# Altium PCB PCB2.PcbDoc (part 4 of 4)
Units mm, origin at the board's own origin, x right, y up, seen from the top; angles counter-clockwise.
Board outline 247 x 102 mm, 2 copper layers (Top Layer, Bottom Layer); 199 components, 195 nets, 863 pads, 110 vias.
Unrouted connection lines stored in the file: 60.
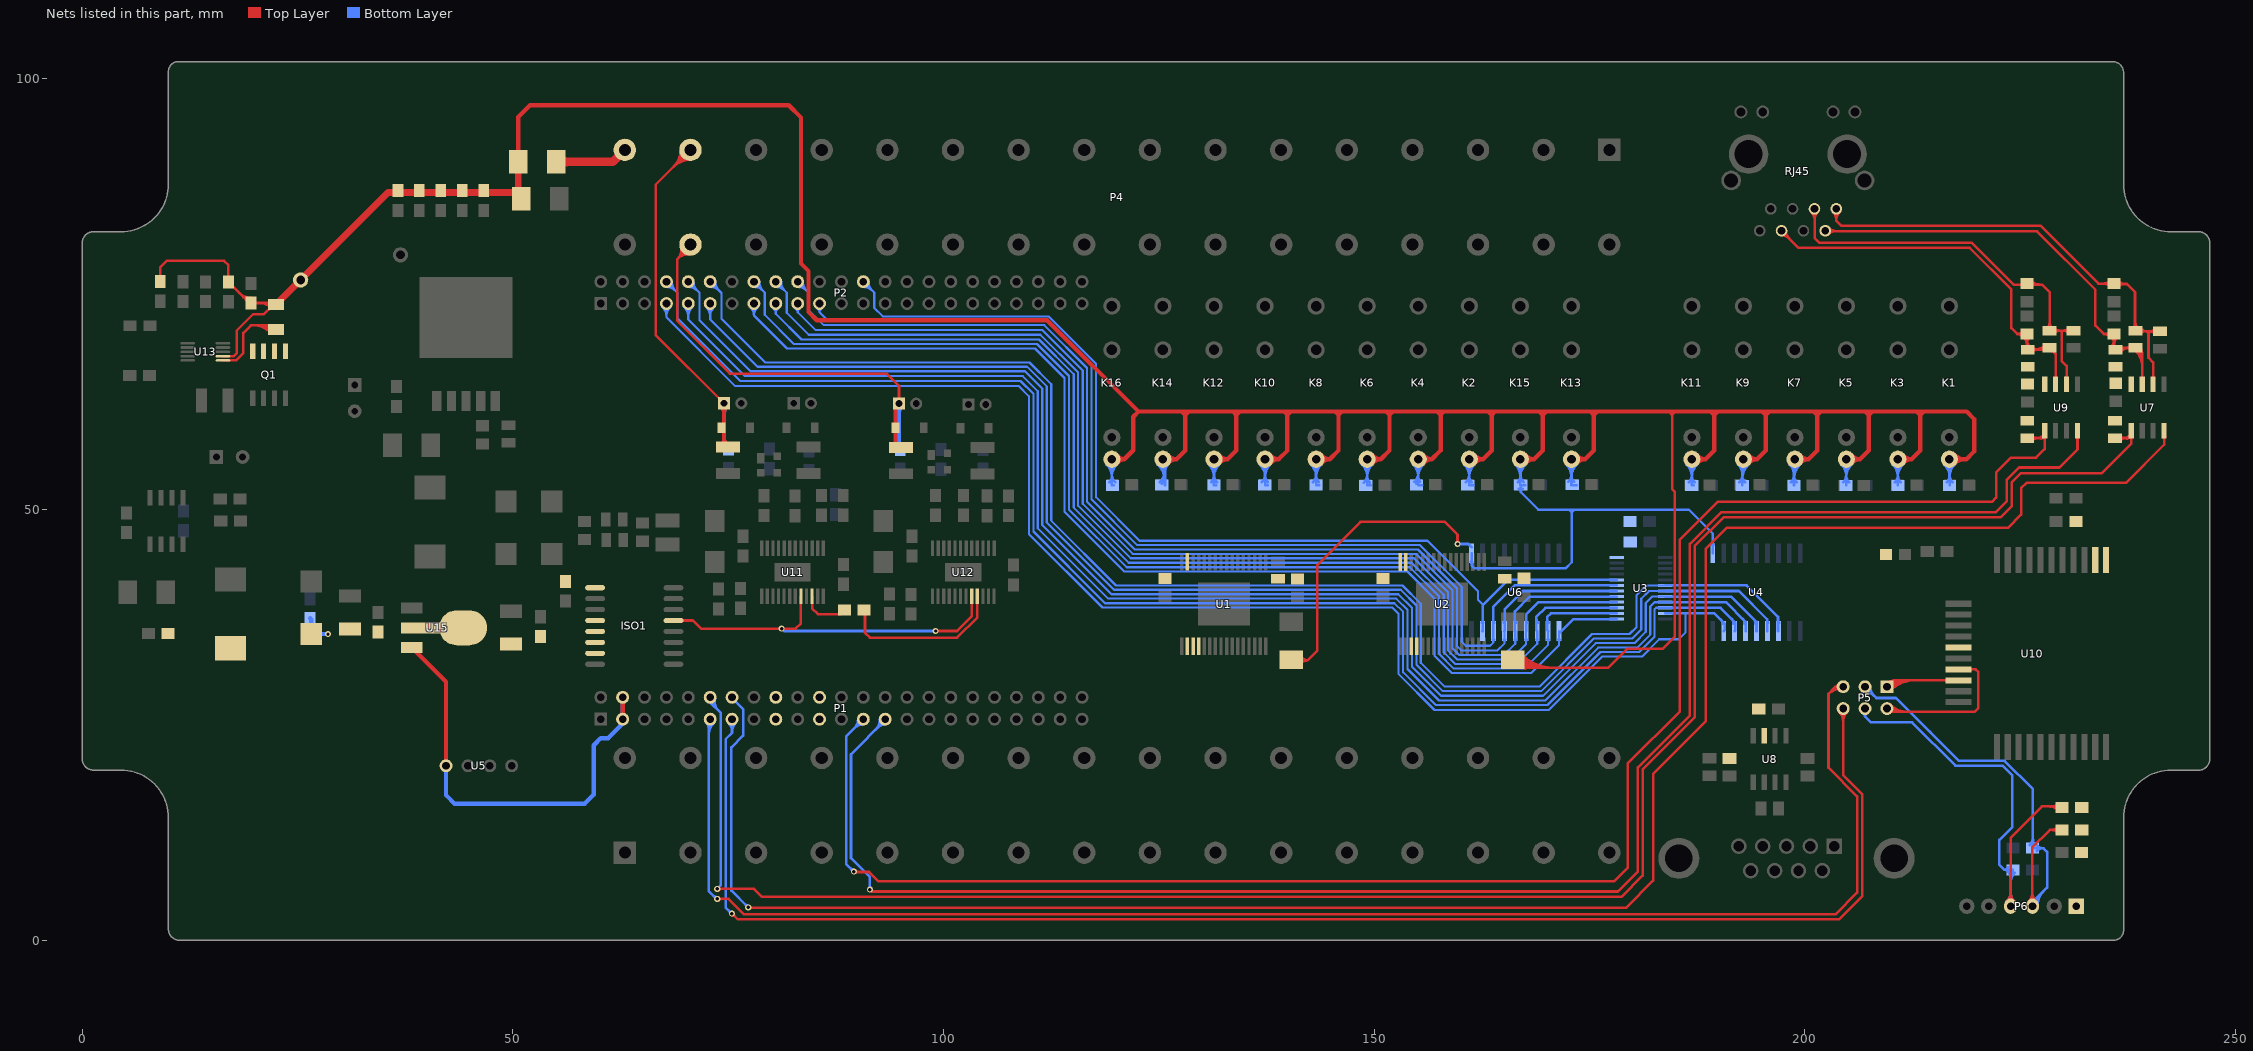
[diagram p4: the nets of this part, all layers, seen from the top]

## Via types
v1: diameter 0.7, hole 0.4, Top Layer to Bottom Layer, 110 vias

## Nets (pads, with @x,y where several pads share a name; then routed paths per layer and width w, separated by ;. In a path a pad name is that pad's centre, name@x,y a point inside that pad or via, vN(x,y) a via of type N, cw(c..) or ccw(c..) an arc to the next point about the centre after c; other vN are vias at no path point) (continued)
PA2: P2.12 U3.6 U4.3 | length 172.9
  Bottom Layer w0.254: P2.12@72.898,75.831 cw(c72.898,74.327) 73.962,75.39 cw(c75.025,76.454) P2.12@73.521,76.454 ; P2.12@72.898,76.085 cw(c72.898,75.194) 73.528,75.824 cw(c74.158,76.454) P2.12@73.267,76.454 ; P2.12@72.898,76.454 74.22,75.132 74.22,72.15 79.29,67.08 109.98,67.08 112.5,64.56 112.5,48.71 120.02,41.19 153.29,41.19 155.41,39.07 155.41,32.21 158.18,29.44 169.18,29.44 175.28,35.54 179.64,35.54 180.46,36.36 180.46,40.08 181.575,41.195 U3.6@183.769,41.195
  Bottom Layer w0.3: U3.6@183.769,41.195 193.225,41.195 196.88,37.54 196.88,35.919 U4.3@196.92,35.879 ; 196.88,37.164 ccw(c197.329,37.164) U4.3@197.011,36.847
PA3: P2.11 U3.7 U4.4 | length 169.4
  Bottom Layer w0.254: P2.11@72.457,73.473 cw(c71.394,72.41) 72.898,72.41 cw(c74.402,72.41) P2.11@73.339,73.473 ; P2.11@72.637,73.653 cw(c72.007,73.023) 72.898,73.023 cw(c73.789,73.023) P2.11@73.159,73.653 ; P2.11@72.898,73.914 72.898,72.072 78.4,66.57 109.7,66.57 111.97,64.3 111.97,48.49 119.78,40.68 153.07,40.68 154.9,38.85 154.9,31.98 157.96,28.92 169.4,28.92 175.5,35.02 179.94,35.02 181,36.08 181,39.65 181.895,40.545 U3.7@183.769,40.545
  Bottom Layer w0.3: U3.7@183.769,40.545 192.335,40.545 195.63,37.25 195.63,35.899 U4.4@195.65,35.879 ; 195.63,37.116 ccw(c196.011,37.116) U4.4@195.741,36.847
PA4: P2.10 U3.8 U4.5 | length 172.5
  Bottom Layer w0.254: P2.10@70.358,75.831 cw(c70.358,74.327) 71.422,75.39 cw(c72.485,76.454) P2.10@70.981,76.454 ; P2.10@70.358,76.085 cw(c70.358,75.194) 70.988,75.824 cw(c71.618,76.454) P2.10@70.727,76.454 ; P2.10@70.358,76.454 71.65,75.162 71.65,71.99 77.59,66.05 109.46,66.05 111.46,64.05 111.46,48.2 119.49,40.17 152.8,40.17 154.38,38.59 154.38,31.76 157.75,28.39 169.61,28.39 175.71,34.49 180.21,34.49 181.52,35.8 181.52,39.14 182.275,39.895 U3.8@183.769,39.895
  Bottom Layer w0.3: U3.8@183.769,39.895 191.435,39.895 194.38,36.95 U4.5@194.38,35.879 ; 194.021,37.309 cw(c193.468,36.755) U4.5@194.251,36.755
PA5: P2.9 U3.9 U4.6 | length 169.4
  Bottom Layer w0.254: P2.9@69.917,73.473 cw(c68.854,72.41) 70.358,72.41 cw(c71.862,72.41) P2.9@70.799,73.473 ; P2.9@70.097,73.653 cw(c69.467,73.023) 70.358,73.023 cw(c71.249,73.023) P2.9@70.619,73.653 ; P2.9@70.358,73.914 70.358,72.072 76.94,65.49 109.2,65.49 110.94,63.75 110.94,47.83 119.11,39.66 152.55,39.66 153.86,38.35 153.86,31.48 157.52,27.82 169.85,27.82 176,33.97 180.53,33.97 182.04,35.48 182.04,38.75 182.535,39.245 U3.9@183.769,39.245
  Bottom Layer w0.3: U3.9@183.769,39.245 190.835,39.245 193.12,36.96 193.12,35.889 U4.6@193.11,35.879 ; 192.737,37.343 cw(c192.149,36.755) U4.6@192.981,36.755
PA6: P2.8 U3.10 U4.7 | length 172.4
  Bottom Layer w0.254: P2.8@67.818,75.831 cw(c67.818,74.327) 68.882,75.39 cw(c69.945,76.454) P2.8@68.441,76.454 ; P2.8@67.818,76.085 cw(c67.818,75.194) 68.448,75.824 cw(c69.078,76.454) P2.8@68.187,76.454 ; P2.8@67.818,76.454 69.12,75.152 69.12,72.19 76.38,64.93 108.94,64.93 110.43,63.44 110.43,47.44 118.74,39.13 152.34,39.13 153.35,38.12 153.35,31.1 157.15,27.3 170.11,27.3 176.26,33.45 180.78,33.45 182.548,35.218 182.548,38.408 182.735,38.595 U3.10@183.769,38.595
  Bottom Layer w0.3: U3.10@183.769,38.595 190.205,38.595 191.91,36.89 191.91,35.949 U4.7@191.84,35.879 ; 191.474,37.326 cw(c190.904,36.755) U4.7@191.711,36.755
PA7: P2.7 U3.11 U4.8 | length 170.7
  Bottom Layer w0.254: P2.7@67.377,73.473 cw(c66.314,72.41) 67.818,72.41 cw(c69.322,72.41) P2.7@68.259,73.473 ; P2.7@67.557,73.653 cw(c66.927,73.023) 67.818,73.023 cw(c68.709,73.023) P2.7@68.079,73.653 ; P2.7@67.818,73.914 67.818,72.312 75.77,64.36 108.69,64.36 109.9,63.15 109.9,47.17 118.45,38.62 152.08,38.62 152.83,37.87 152.83,30.89 156.99,26.73 170.26,26.73 176.46,32.93 181.1,32.93 183.1,34.93 185.33,34.93 186.15,35.75 186.15,37.945
  Bottom Layer w0.3: U3.11@183.769,37.945 189.495,37.945 190.68,36.76 190.68,35.989 U4.8@190.57,35.879 ; 190.268,37.172 cw(c189.851,36.755) U4.8@190.441,36.755
PB0: P2.15 U3.13 U6.1 | length 139.3
  Bottom Layer w0.254: P2.15@77.565,73.447 cw(c76.757,72.532) 77.978,72.532 ; P2.15@77.734,73.637 cw(c77.255,73.095) 77.978,73.095 cw(c78.701,73.095) P2.15@78.222,73.637 ; P2.15@77.978,73.914 77.978,72.532 ; P2.15@78.391,73.447 ccw(c79.199,72.532) 77.978,72.532 ; U6.1@171.352,34.895 cw(c171.092,34.635) 171.46,34.635 cw(c171.828,34.635) U6.1@171.568,34.895 ; U6.1@171.46,35.879 171.46,34.25 168.23,31.02 158.99,31.02 157,33.01 157,39.66 153.86,42.8 120.98,42.8 114.04,49.74 114.04,65.27 110.62,68.69 81.82,68.69 77.978,72.532
  Bottom Layer w0.3: U6.1@171.46,35.59 173.14,37.27 178.106,37.27 U3.13@178.131,37.295
PB1: P2.16 U3.14 U6.2 | length 142.9
  Bottom Layer w0.254: P2.16@77.978,75.831 cw(c77.978,74.327) 79.042,75.39 cw(c80.105,76.454) P2.16@78.601,76.454 ; P2.16@77.978,76.085 cw(c77.978,75.194) 78.608,75.824 cw(c79.238,76.454) P2.16@78.347,76.454 ; P2.16@77.978,76.454 79.24,75.192 79.24,72.6 82.62,69.22 110.85,69.22 114.57,65.5 114.57,49.99 121.25,43.31 154.12,43.31 157.51,39.92 157.51,33.25 159.23,31.53 167.42,31.53 170.19,34.3 U6.2@170.19,35.879 ; U6.2@170.082,34.895 cw(c169.822,34.635) 170.19,34.635 cw(c170.558,34.635) U6.2@170.298,34.895
  Bottom Layer w0.3: 170.07,37.357 ccw(c170.792,37.357) U6.2@170.281,36.847 ; U6.2@170.19,35.879 170.07,35.999 170.07,37.52 170.495,37.945 U3.14@178.131,37.945
PB2: P2.17 U3.15 U6.3 | length 135.9
  Bottom Layer w0.254: P2.17@80.166,73.4 cw(c79.708,72.732) 80.518,72.732 ; P2.17@80.518,73.914 80.518,72.732 ; P2.17@80.87,73.4 ccw(c81.328,72.732) 80.518,72.732 ; U6.3@168.812,34.895 cw(c168.552,34.635) 168.92,34.635 cw(c169.288,34.635) U6.3@169.028,34.895 ; U6.3@168.92,35.879 168.92,34.41 166.56,32.05 159.43,32.05 158.06,33.42 158.06,40.1 154.328,43.832 121.498,43.832 115.11,50.22 115.11,65.7 111.07,69.74 83.51,69.74 80.518,72.732
  Bottom Layer w0.3: 168.83,37.285 ccw(c169.45,37.285) U6.3@169.011,36.847 ; U6.3@168.92,35.879 168.83,35.969 168.83,37.56 169.865,38.595 U3.15@178.131,38.595
PB3: P2.18 U3.16 U6.4 | length 139.6
  Bottom Layer w0.254: P2.18@80.518,75.831 cw(c80.518,74.327) 81.582,75.39 cw(c82.645,76.454) P2.18@81.141,76.454 ; P2.18@80.518,76.085 cw(c80.518,75.194) 81.148,75.824 cw(c81.778,76.454) P2.18@80.887,76.454 ; P2.18@80.518,76.454 81.79,75.182 81.79,72.85 84.34,70.3 111.23,70.3 115.62,65.91 115.62,50.44 121.72,44.34 154.61,44.34 158.58,40.37 158.58,33.62 159.62,32.58 165.84,32.58 167.63,34.37 U6.4@167.63,35.899 ; U6.4@167.542,34.895 cw(c167.33,34.683) 167.63,34.683 ; 167.63,34.586 cw(c168.066,34.586) U6.4@167.758,34.895
  Bottom Layer w0.3: U6.4@167.63,35.879 167.63,37.79 169.085,39.245 U3.16@178.131,39.245 ; U6.4@167.63,35.899 U6.4@167.65,35.879 ; 167.63,37.116 ccw(c168.011,37.116) U6.4@167.742,36.847
PB4: P2.19 U3.17 U6.5 | length 132.8
  Bottom Layer w0.254: P2.19@82.782,73.355 cw(c82.564,72.912) 83.058,72.912 ; P2.19@83.058,73.914 83.058,72.912 ; P2.19@83.334,73.355 ccw(c83.552,72.912) 83.058,72.912 ; U6.5@166.272,34.895 cw(c166.012,34.635) 166.38,34.635 cw(c166.748,34.635) U6.5@166.488,34.895 ; U6.5@166.38,35.879 166.38,34.42 165.07,33.11 159.86,33.11 159.1,33.87 159.1,40.61 154.855,44.855 121.955,44.855 116.15,50.66 116.15,66.14 111.43,70.86 85.11,70.86 83.058,72.912
  Bottom Layer w0.3: U6.5@166.32,35.879 166.32,38.16 168.055,39.895 U3.17@178.131,39.895 ; U6.5@166.32,35.939 U6.5@166.38,35.879 ; 166.32,37.212 ccw(c166.837,37.212) U6.5@166.472,36.847
PB5: P2.20 U3.18 U6.6 | length 137
  Bottom Layer w0.254: P2.20@83.058,75.831 cw(c83.058,74.327) 84.122,75.39 cw(c85.185,76.454) P2.20@83.681,76.454 ; P2.20@83.058,76.085 cw(c83.058,75.194) 83.688,75.824 cw(c84.318,76.454) P2.20@83.427,76.454 ; P2.20@83.058,76.454 84.35,75.162 84.35,73.14 86.08,71.41 111.68,71.41 116.66,66.43 116.66,50.91 122.207,45.363 155.077,45.363 159.61,40.83 159.61,34.13 160.09,33.65 164.3,33.65 165.14,34.49 U6.6@165.14,36.07 ; U6.6@165.002,34.895 cw(c164.67,34.562) 165.14,34.562 ; 165.14,34.707 cw(c165.406,34.707) U6.6@165.218,34.895
  Bottom Layer w0.3: U6.6@165.019,36.847 ccw(c164.725,37.14) 165.14,37.14 ; U6.6@165.11,35.879 165.14,35.909 165.14,38.42 167.265,40.545 U3.18@178.131,40.545
PB6: P2.21 U3.19 U6.7 | length 129.8
  Bottom Layer w0.254: P2.21@85.317,73.358 cw(c85.088,72.902) 85.598,72.902 ; P2.21@85.598,73.914 85.598,72.902 ; P2.21@85.879,73.358 ccw(c86.108,72.902) 85.598,72.902 ; U6.7@163.732,34.895 cw(c163.544,34.707) 163.81,34.707 ; 163.81,34.562 cw(c164.28,34.562) U6.7@163.948,34.895 ; U6.7@163.81,35.909 163.81,34.55 163.45,34.19 160.62,34.19 160.16,34.65 160.16,41.02 155.309,45.871 122.479,45.871 117.17,51.18 117.17,66.68 111.93,71.92 86.58,71.92 85.598,72.902
  Bottom Layer w0.3: U6.7@163.81,35.879 163.81,38.71 166.295,41.195 U3.19@178.131,41.195 ; U6.7@163.81,35.909 U6.7@163.84,35.879 ; 163.81,37.14 ccw(c164.225,37.14) U6.7@163.931,36.847
PB7: P2.26 U3.20 U6.8 | length 122.2
  Bottom Layer w0.254: P2.26@90.678,75.831 cw(c90.678,74.327) 91.742,75.39 cw(c92.805,76.454) P2.26@91.301,76.454 ; P2.26@90.678,76.085 cw(c90.678,75.194) 91.308,75.824 cw(c91.938,76.454) P2.26@91.047,76.454 ; P2.26@90.678,76.454 91.94,75.192 91.94,73.41 92.92,72.43 112.17,72.43 117.71,66.89 117.71,51.42 122.751,46.379 156.181,46.379 162.05,40.51 162.05,39.51 162.58,38.98 162.58,38.925
  Bottom Layer w0.3: U6.8@162.479,36.847 ccw(c162.233,37.092) 162.58,37.092 ; U6.8@162.57,35.879 162.58,35.889 162.58,38.925 ; 162.58,37.043 ccw(c162.858,37.043) U6.8@162.661,36.847 ; 162.615,38.925 165.535,41.845 U3.20@178.131,41.845
PWM_TIM1_CH3: U10.16
RS485A1: C9.2 R22.1 R23.1 RJ45.1 U7.6 | length 64.8
  Top Layer w0.3: RJ45.1@203.279,84.539 cw(c202.383,83.643) 203.65,83.643 cw(c204.917,83.643) RJ45.1@204.021,84.539 ; RJ45.1@203.65,84.91 203.65,83.52 204.2,82.97 227.33,82.97 234.07,76.23 C9.2@235.9,76.23 235.94,76.19 237.38,76.19 238.33,75.24 R22.1@238.33,70.68 ; C9.2@235.446,75.876 ccw(c234.593,75.023) 234.593,76.23 ccw(c234.593,77.437) C9.2@235.446,76.584 ; C9.2@236.354,75.876 cw(c237.111,75.119) 237.111,76.19 ; C9.2@236.354,76.584 ccw(c237.304,77.534) 237.304,76.19 ; R22.1@238.107,71.063 ccw(c237.569,71.601) 238.33,71.601 ; R22.1@238.23,70.58 R22.1@238.33,70.68 ; 238.33,71.891 ccw(c239.501,71.891) R22.1@238.673,71.063 ; R22.1@238.923,70.497 cw(c239.364,70.056) 239.364,70.68 ; R22.1@238.923,71.063 ccw(c239.847,71.987) 239.847,70.68 ; 239.67,70.66 239.89,70.44 ; 240.11,70.66 239.89,70.44 ; U7.6@240.328,65.246 ccw(c240.072,65.502) 240.434,65.502 ccw(c240.796,65.502) U7.6@240.54,65.246 ; U7.6@240.434,64.54 240.434,67.086 239.89,67.63 239.89,70.44 ; R23.1@240.707,70.397 ccw(c240.024,69.714) 240.024,70.68 ccw(c240.024,71.646) R23.1@240.707,70.963 ; R23.1@241.24,70.68 R22.1@238.33,70.68
RS485A2: C12.2 R29.1 R30.1 RJ45.3 U9.6 | length 57.2
  Top Layer w0.3: RJ45.3@200.739,84.539 cw(c199.77,83.57) 201.14,83.57 ; RJ45.3@201.11,84.91 201.14,84.88 201.14,81.53 201.71,80.96 219.38,80.96 224.23,76.11 227.53,76.11 228.41,75.23 R29.1@228.41,70.78 R30.1@231.2,70.78 ; 201.14,83.715 cw(c202.305,83.715) RJ45.3@201.481,84.539 ; C12.2@225.69,76.23 C12.2@225.81,76.11 ; C12.2@226.011,76.371 ccw(c226.643,77.003) 226.643,76.11 ; C12.2@226.224,75.876 cw(c226.787,75.313) 226.787,76.11 ; C12.2@226.224,76.584 ccw(c227.367,77.727) 227.367,76.11 ; R29.1@228.127,71.063 ccw(c227.444,71.746) 228.41,71.746 ccw(c229.376,71.746) R29.1@228.693,71.063 ; R29.1@228.943,70.497 cw(c229.626,69.814) 229.626,70.78 cw(c229.626,71.746) R29.1@228.943,71.063 ; 229.63,70.78 229.81,70.6 ; 229.99,70.78 229.81,70.6 ; U9.6@230.278,65.246 ccw(c230.022,65.502) 230.384,65.502 ccw(c230.746,65.502) U9.6@230.49,65.246 ; U9.6@230.384,64.54 230.384,66.666 229.81,67.24 229.81,70.6 ; R30.1@230.667,70.497 ccw(c229.984,69.814) 229.984,70.78 ccw(c229.984,71.746) R30.1@230.667,71.063
RS485B1: C8.2 R21.1 R22.2 RJ45.2 U7.7 | length 67.3
  Top Layer w0.3: RJ45.2@202.37,82.13 202.54,82.3 226.95,82.3 233.73,75.52 233.73,71.35 234.71,70.37 ; RJ45.2@202.529,82.529 ccw(c203.082,83.082) 203.082,82.3 ; RJ45.2@202.741,81.999 cw(c203.468,81.272) 203.468,82.3 ; RJ45.2@202.741,82.741 ccw(c203.806,83.806) 203.806,82.3 ; C8.2@235.421,70.044 ccw(c234.71,69.432) 234.71,70.37 ; C8.2@235.421,70.696 cw(c234.71,71.308) 234.71,70.37 ; R21.1@235.537,68.863 ccw(c234.661,69.739) C8.2@235.9,69.739 ; C8.2@235.546,70.016 cw(c234.693,69.163) 235.9,69.163 cw(c237.107,69.163) C8.2@236.254,70.016 ; 235.9,69.353 ccw(c236.593,69.353) R21.1@236.103,68.863 ; R21.1@236.391,68.509 cw(c237.044,67.856) 237.044,68.78 ; R21.1@236.603,68.297 cw(c237.769,67.131) R22.2@237.769,68.78 ; R22.2@237.857,68.497 ccw(c237.174,67.814) 237.174,68.78 ccw(c237.174,69.746) R22.2@237.857,69.063 ; R22.2@238.357,68.497 cw(c236.41,66.55) 239.164,66.55 ; R22.2@238.39,68.78 236.27,68.78 R21.1@236.07,68.58 235.9,68.75 C8.2@235.9,70.37 234.71,70.37 ; R22.2@238.51,68.8 239.164,68.146 U7.7@239.164,64.54 ; R22.2@238.569,68.709 cw(c237.134,67.274) 239.164,67.274 ; R22.2@238.654,68.38 cw(c238.676,67.768) 239.109,68.201 cw(c239.401,68.493) R22.2@239.014,68.639 ; R22.2@238.781,68.921 cw(c237.858,67.998) 239.164,67.998 ; U7.7@239.058,65.246 ccw(c238.802,65.502) 239.164,65.502 ccw(c239.526,65.502) U7.7@239.27,65.246
RS485B2: C11.2 R28.1 R29.2 RJ45.6 U9.7 | length 56.6
  Top Layer w0.3: RJ45.6@197.29,81.845 cw(c197.29,80.578) 198.186,81.474 cw(c199.082,82.37) RJ45.6@197.815,82.37 ; RJ45.6@197.29,82.37 199.27,80.39 219.14,80.39 223.97,75.56 223.97,71.08 224.68,70.37 ; C11.2@225.268,70.073 ccw(c224.68,69.64) 224.68,70.37 ; C11.2@225.268,70.667 cw(c224.68,71.1) 224.68,70.37 ; C11.2@225.416,70.016 cw(c224.563,69.163) 225.77,69.163 cw(c226.977,69.163) C11.2@226.124,70.016 ; R28.1@225.597,68.863 ccw(c225.18,69.28) 225.77,69.28 ; C11.2@225.77,69.811 ccw(c227.111,69.811) R28.1@226.163,68.863 ; R28.1@226.413,68.297 cw(c227.096,67.614) 227.096,68.58 cw(c227.096,69.546) R28.1@226.413,68.863 ; 226.711,68.58 ccw(c226.711,70.229) R29.2@227.877,69.063 ; 227.436,68.58 ccw(c227.436,69.504) R29.2@228.089,68.851 ; R29.2@228.66,68.38 cw(c228.66,68.018) R29.2@228.916,68.274 ; R29.2@228.971,68.529 ccw(c229.162,68.375) 228.989,68.201 ; U9.7@229.008,65.246 ccw(c228.752,65.502) 229.114,65.502 ccw(c229.476,65.502) U9.7@229.22,65.246 ; U9.7@229.114,64.54 229.114,68.076 R29.2@228.41,68.78 228.21,68.58 R28.1@225.88,68.58 225.77,68.69 C11.2@225.77,70.37 224.68,70.37
SCLK_AO: ISO1.13 U11.8 U12.8 | length 44.4
  Top Layer w0.3: ISO1.13@68.64,37.115 70.905,37.115 71.85,36.17 82.81,36.17 83.433,36.793 U11.8@83.433,39.944 ; ISO1.13@69.596,37.009 cw(c69.852,36.753) 69.852,37.115 cw(c69.852,37.477) ISO1.13@69.596,37.221 ; v1(99.07,35.9) 101.563,35.9 103.263,37.6 U12.8@103.263,39.944
  Bottom Layer w0.3: v1@81.19,36.19 81.48,35.9 v1(99.07,35.9)
  other v1: 81.2,36.17
SDI2: R38.1 U12.9 | length 19.4
  Top Layer w0.3: R38.1@90.78,38.33 90.88,38.23 90.88,35.68 91.431,35.129 101.576,35.129 103.913,37.467 U12.9@103.913,39.944
SDO1: R38.2 U11.10 | length 5.7
  Top Layer w0.3: U11.10@84.733,39.944 84.733,38.527 85.41,37.85 88.014,37.85 R38.2@88.494,38.33
SPI0_CS0: P1.17 U1.4 U2.4
SPI0_MISO: ISO1.6 P1.21 U2.32
SPI0_MOSI: ISO1.5 P1.18 U1.2
SPI0_SCLK: ISO1.4 P1.22 U1.3 U2.3
UART2_RX-O: P1.11 P5.5 | length 194.7
  Top Layer w0.3: v1(73.72,4.79) 75.03,4.79 76.82,3 203.54,3 206.06,5.52 206.06,16.71 202.74,20.03 202.74,28.59 203.58,29.43 ; v1@73.861,4.649 cw(c74.203,4.307) 74.203,4.79 cw(c74.203,5.273) v1@73.861,4.931 ; 202.732,28.582 cw(c204.112,27.202) P5.5@204.396,29.133 ; 203.15,29 cw(c203.586,28.564) P5.5@204.019,29.003 ; 203.154,29.004 cw(c204.221,27.938) P5.5@204.44,29.43 ; 203.364,29.214 cw(c203.798,28.779) P5.5@204.229,29.216 ; 203.576,29.426 cw(c204.329,28.674) P5.5@204.484,29.727 ; 203.577,29.427 cw(c204.01,28.994) P5.5@204.44,29.43 ; P5.5@203.877,29.223 ccw(c203.58,29.114) 203.58,29.43 ; P5.5@203.877,29.637 cw(c203.58,29.746) 203.58,29.43 ; 203.58,29.43 P5.5@204.44,29.43
  Bottom Layer w0.3: P1.11@72.474,25.234 cw(c71.903,24.663) 72.71,24.663 ; 72.71,23.756 cw(c74.8,23.756) P1.11@73.322,25.234 ; 72.71,24.48 cw(c74.076,24.48) P1.11@73.11,25.446 ; P1.11@72.898,25.658 72.71,25.47 72.71,5.73 v1@73.685,4.755 ; 73.259,5.181 ccw(c73.72,5.642) v1@73.72,4.99 ; 73.428,5.012 cw(c73.206,4.79) v1@73.52,4.79
UART2_TX-O: P1.13 P5.6 | length 184.6
  Top Layer w0.3: v1@75.42,2.88 cw(c75.42,2.325) 75.813,2.717 ; v1@75.435,3.095 76.1,2.43 203.98,2.43 206.68,5.13 206.68,16.93 204.44,19.17 P5.6@204.44,26.89 ; v1@75.62,3.08 ccw(c76.03,3.08) 75.74,2.79 ; P5.6@204.016,26.466 cw(c202.991,25.441) 204.44,25.441 cw(c205.889,25.441) P5.6@204.864,26.466
  Bottom Layer w0.3: P1.13@75.014,25.234 cw(c73.989,24.209) 75.438,24.209 cw(c76.887,24.209) P1.13@75.862,25.234 ; v1@75.22,3.08 ccw(c74.737,3.08) 75.079,3.421 ccw(c75.42,3.763) v1@75.42,3.28 ; v1(75.42,3.08) 74.69,3.81 74.69,23.33 75.438,24.078 P1.13@75.438,25.658
UART3_RX: P1.12 R19.1 U7.1 | length 241.5
  Top Layer w0.3: v1(73.72,5.97) 78.01,5.97 78.94,5.04 178.7,5.04 181.17,7.51 181.17,19.84 187.208,25.878 187.208,45.748 190.56,49.1 222.72,49.1 224,50.38 224,53.15 225.08,54.23 234.47,54.23 237.894,57.654 U7.1@237.894,59.14 ; v1@73.861,5.829 cw(c74.203,5.487) 74.203,5.97 cw(c74.203,6.453) v1@73.861,6.111 ; R19.1@235.99,58.3 237.48,58.3 ; R19.1@236.523,58.017 cw(c237.206,57.334) 237.206,58.3 cw(c237.206,59.266) R19.1@236.523,58.583 ; 236.952,58.3 ccw(c236.952,59.482) U7.1@237.788,58.646 ; 237.393,58.213 cw(c237.827,57.779) U7.1@237.881,58.391 ; U7.1@237.744,58.549 cw(c237.48,58.564) 237.48,58.3 ; U7.1@237.788,58.434 cw(c237.532,58.178) 237.894,58.178 cw(c238.256,58.178) U7.1@238,58.434 ; U7.1@237.92,58.74 237.48,58.3
  Bottom Layer w0.3: 73.1,27.42 cw(c73.661,27.981) P1.12@72.898,28.198 72.898,27.622 74.11,26.41 74.11,6.36 v1(73.72,5.97) ; P1.12@73.187,28.116 ccw(c74.223,27.821) 73.461,27.059 ; P1.12@73.475,28.034 ccw(c74.785,27.661) 73.822,26.698
UART3_TX: P1.14 U7.4 | length 236.7
  Top Layer w0.3: v1@77.3,3.79 179.26,3.79 182.374,6.904 182.374,19.314 188.473,25.413 188.473,45.44 190.903,47.87 223.56,47.87 225.108,49.418 225.108,52.475 225.733,53.1 237.28,53.1 241.704,57.524 U7.4@241.704,59.14 ; U7.4@241.598,58.434 cw(c241.342,58.178) 241.704,58.178 cw(c242.066,58.178) U7.4@241.81,58.434
  Bottom Layer w0.3: P1.14@75.438,28.198 75.438,28.112 76.73,26.82 76.73,23.76 75.37,22.4 75.37,5.765 v1(77.32,3.815) ; v1@77.12,3.815 ccw(c76.637,3.815) 76.979,4.156 ccw(c77.32,4.498) v1@77.32,4.015
UART4_RX: P1.25 R27.1 U9.1 | length 210.8
  Top Layer w0.3: v1(89.59,7.96) 89.63,7.92 91.353,7.92 92.453,6.82 177.84,6.82 179.41,8.39 179.41,20.5 185.48,26.57 185.48,46.51 189.87,50.9 221.72,50.9 222.21,51.39 222.21,54.32 223.92,56.03 226.85,56.03 227.844,57.024 U9.1@227.844,59.14 ; v1@89.731,7.819 cw(c89.976,7.574) 89.976,7.92 ; v1@89.731,8.101 ccw(c90.169,8.539) 90.169,7.92 ; R27.1@225.81,58.3 227.49,58.3 U9.1@227.83,58.64 ; R27.1@226.343,58.017 cw(c227.026,57.334) 227.026,58.3 cw(c227.026,59.266) R27.1@226.343,58.583 ; 226.902,58.3 ccw(c226.902,59.482) U9.1@227.738,58.646 ; 227.433,58.243 cw(c227.792,57.884) U9.1@227.832,58.39 ; U9.1@227.626,58.3 ccw(c227.626,58.757) 227.95,58.434 ccw(c228.206,58.178) 227.844,58.178 ccw(c227.482,58.178) U9.1@227.738,58.434
  Bottom Layer w0.3: v1@89.39,7.96 ccw(c88.907,7.96) 89.249,8.301 ccw(c89.59,8.643) v1@89.59,8.16 ; v1(89.59,7.96) 88.692,8.858 88.692,23.672 P1.25@90.678,25.658 ; P1.25@90.078,25.658 cw(c88.629,25.658) 89.654,24.634 cw(c90.678,23.609) P1.25@90.678,25.058
UART4_TX: P1.27 U9.4 | length 210.7
  Top Layer w0.3: v1(91.44,5.87) 91.66,5.65 178.29,5.65 180.61,7.97 180.61,20.07 186.654,26.114 186.654,46.014 190.33,49.69 222.17,49.69 223.42,50.94 223.42,53.43 224.87,54.88 229.56,54.88 231.654,56.974 U9.4@231.654,59.14 ; U9.4@231.548,58.434 cw(c231.292,58.178) 231.654,58.178 cw(c232.016,58.178) U9.4@231.76,58.434
  Bottom Layer w0.3: v1@91.299,6.011 ccw(c90.957,6.353) 91.44,6.353 ccw(c91.923,6.353) v1@91.581,6.011 ; v1(91.44,5.87) 91.44,7.34 89.246,9.534 89.246,21.576 93.218,25.548 P1.27@93.218,25.658 ; 92.116,24.446 ccw(c90.904,25.658) P1.27@92.618,25.658 ; 92.382,24.712 cw(c93.218,23.875) P1.27@93.218,25.058 ; 92.628,24.958 ccw(c91.928,25.658) P1.27@92.918,25.658
UART_RXD: C16.2 P5.3 P6.3 R33.2 | length 65.4
  Top Layer w0.3: P6.3@225.996,4.513 ccw(c225.044,5.465) 226.39,5.465 ; 226.39,4.886 ccw(c227.217,4.886) P6.3@226.632,4.301 ; 226.39,5.61 ccw(c227.941,5.61) P6.3@226.844,4.513 ; P6.3@226.42,3.95 226.39,3.98 226.39,10.77 228.43,12.81 R33.2@229.864,12.81 ; R33.2@229.394,12.467 ccw(c228.566,11.639) 228.566,12.81 ccw(c228.566,13.981) R33.2@229.394,13.153
  Bottom Layer w0.3: P5.3@206.98,28.83 cw(c206.98,27.381) 208.004,28.406 cw(c209.029,29.43) P5.3@207.58,29.43 ; P5.3@206.98,29.43 208.29,28.12 210.58,28.12 214.51,24.19 214.52,24.19 217.89,20.82 223.177,20.82 226.466,17.531 C16.2@226.466,10.67 ; C16.2@226.093,11.043 ccw(c225.193,11.943) 226.466,11.943 ; P6.3@226.42,3.95 226.42,4.41 228.13,6.12 228.13,10.24 227.7,10.67 ; P6.3@226.42,4.689 ccw(c226.42,5.363) 226.896,4.886 ; C16.2@226.436,10.7 C16.2@226.466,10.67 ; 226.466,11.798 ccw(c227.534,11.798) C16.2@226.779,11.043 ; P6.3@226.72,4.089 cw(c228.219,4.089) 227.159,5.149 ; C16.2@226.906,10.357 cw(c227.661,9.602) 227.661,10.67 ; C16.2@226.928,11.02 ccw(c227.7,11.697) 227.7,10.67 ; P6.3@227.02,4.089 cw(c229.243,4.089) 227.671,5.661 ; C16.2@226.466,10.67 227.7,10.67
UART_RXD1: P5.1 U10.19 | length 18.5
  Top Layer w0.3: P5.1@209.308,29.642 cw(c210.587,28.363) 210.587,30.172 ; P5.1@209.732,29.218 cw(c212.036,26.914) 212.036,30.172 ; P5.1@209.944,29.006 cw(c212.76,26.19) 212.76,30.172 ; 211.311,30.172 ccw(c211.311,27.639) P5.1@209.52,29.43 210.262,30.172 U10.19@217.843,30.172 ; U10.19@216.552,30.031 ccw(c216.21,29.689) 216.21,30.172 ccw(c216.21,30.655) U10.19@216.552,30.313
UART_TXD: C15.2 P5.4 P6.4 R32.2 | length 64.9
  Top Layer w0.3: P6.4@223.456,4.513 ccw(c222.431,5.538) 223.88,5.538 ccw(c225.329,5.538) P6.4@224.304,4.513 ; P6.4@223.88,3.95 223.88,11.89 227.53,15.54 229.754,15.54 R32.2@229.864,15.43 ; 228.301,15.54 cw(c228.301,13.994) R32.2@229.394,15.087 ; 228.832,15.54 ccw(c228.832,16.335) R32.2@229.394,15.773 ; 229.025,15.54 cw(c229.025,14.718) R32.2@229.606,15.299
  Bottom Layer w0.3: P5.4@206.744,26.339 cw(c206.59,25.98) 206.98,25.98 ; P5.4@206.98,26.89 206.98,25.98 ; P5.4@207.216,26.339 ccw(c207.37,25.98) 206.98,25.98 ; P6.4@223.456,4.513 ccw(c222.431,5.538) 223.88,5.538 ccw(c225.329,5.538) P6.4@224.304,4.513 ; C15.2@223.6,7.922 ccw(c223.13,7.644) 223.13,8.19 ; C15.2@223.618,8.446 cw(c223.13,8.783) 223.13,8.19 ; C15.2@223.674,7.827 cw(c223.177,7.33) 223.88,7.33 ; P6.4@223.88,3.95 223.88,7.906 C15.2@224.144,8.17 ; 223.88,6.668 cw(c225.519,6.668) C15.2@224.36,7.827 ; 223.88,7.393 cw(c224.794,7.393) C15.2@224.148,8.039 ; C15.2@223.93,8.19 223.13,8.19 ; 206.98,25.98 207.67,25.29 212.46,25.29 217.49,20.26 222.953,20.26 224.08,19.133 224.08,13.15 222.58,11.65 222.58,8.74 223.13,8.19
UART_TXD1: P5.2 U10.18 | length 23.1
  Top Layer w0.3: P5.2@209.732,27.102 ccw(c211.162,28.532) 211.162,26.51 ; P5.2@209.944,27.314 ccw(c211.886,29.256) 211.886,26.51 ; 210.437,26.51 cw(c210.437,27.807) P5.2@209.52,26.89 209.9,26.51 219.71,26.51 220.15,26.95 220.15,31.12 219.828,31.442 U10.18@217.843,31.442 ; U10.18@219.134,31.301 cw(c219.476,30.959) 219.476,31.442 cw(c219.476,31.925) U10.18@219.134,31.583
V3_3D: C1.2 C2.2 C3.2 C4.2 C5.1 C6.1 C7.1 C10.1 C13.1 C30.1 C60.1 CA1.1 D19.1 ISO1.1 ISO1.7 P6.1 R1.1 R2.1 R19.2 R21.2 R25.2 R27.2 R28.2 R31.2 R32.1 R33.1 R34.2 U1.31 U2.31 U3.24 U7.8 U8.3 U9.8 U10.1 U10.2 U15.2
V24_IN: D26.1 P4.31 | length 10.7
  Top Layer w1: D26.1@55.033,90.36 61.592,90.36 P4.31@62.992,91.76 ; D26.1@55.443,89.95 cw(c56.432,88.961) 56.432,90.36 cw(c56.432,91.759) D26.1@55.443,90.77
VCC24V: C38.2 C39.2 C40.2 C41.2 C42.2 C44.1 D1.2 D2.2 D26.2 D27.1 K1.4 K2.4 K3.4 K4.4 K5.4 K6.4 K7.4 K8.4 K9.4 K10.4 K11.4 K12.4 K13.4 K14.4 K15.4 K16.4 R3.1 R4.1 R5.1 R6.1 R7.1 R8.2 R9.1 R10.2 R11.1 R12.2 R13.1 R14.2 R15.1 R16.2 R17.1 R18.2 R45.1 R46.2 R47.2 TP1.1 U4.10 U6.10 U13.2 | length 775.8
  Top Layer w0.3: R47.2@9.05,76.466 9.06,76.476 9.06,78.15 9.79,78.88 16.47,78.88 16.96,78.39 R46.2@16.96,76.416 19.396,73.98 22.32,73.98 R45.1@22.5,73.8 ; U13.2@16.33,67.81 17.6,67.81 17.93,68.14 17.93,70.76 19.85,72.68 21.09,72.68 R45.1@22.01,73.6 ; 18.207,75.169 ccw(c19.6,76.562) C44.1@19.6,74.592 ; 18.719,74.657 ccw(c19.6,75.538) C44.1@19.6,74.292 ; C44.1@19.006,74.37 cw(c18.743,74.107) C44.1@19.115,74.107 ; 20.583,73.98 cw(c20.583,72.158) R45.1@21.871,73.446 ; 21.308,73.98 cw(c21.308,72.883) R45.1@22.084,73.659 ; 21.452,73.98 ccw(c21.452,74.573) R45.1@21.871,74.154 ; D1.2@140.89,32.49 142.26,32.49 ; D1.2@141.23,32.84 ccw(c141.785,33.104) 141.785,32.49 ; D1.2@141.433,32.05 cw(c142.26,31.492) 142.26,32.49 ; D1.2@141.501,32.969 ccw(c142.26,33.33) 142.26,32.49 ; v1@159.529,46.141 ccw(c159.187,46.483) 159.67,46.483 ccw(c160.153,46.483) v1@159.811,46.141 ; v1(159.67,46) 159.67,47.09 158.19,48.57 148.38,48.57 143.39,43.58 143.39,33.62 142.26,32.49 ; D2.2@165.959,32.167 ccw(c167.302,33.51) D2.2@167.302,31.61 ; D2.2@166.171,32.379 ccw(c168.027,34.235) 168.027,31.61 ; D2.2@166.26,32.8 167.45,31.61 177.14,31.61 179.38,33.85 183.52,33.85 184.91,35.24 184.91,52.04 184.59,52.36 184.59,61 ; D2.2@166.383,32.591 ccw(c168.751,34.959) 168.751,31.61 ; D2.2@166.595,32.803 ccw(c169.475,35.683) 169.475,31.61 ; D2.2@166.599,31.987 cw(c166.805,31.477) D2.2@167.194,31.866 ; D2.2@166.711,31.709 cw(c166.99,31.022) 167.514,31.546 cw(c168.151,32.183) D2.2@167.27,32.373 ; D2.2@166.807,33.015 ccw(c170.199,36.407) 170.199,31.61 ; D2.2@167.019,33.227 ccw(c170.924,37.132) 170.924,31.61 ; K13.4@172.898,55.842 172.966,55.91 K13.4@172.986,55.89 ; 184.195,61.395 184.59,61 ; 184.985,61.395 184.59,61
  Top Layer w0.5: D26.2@50.613,90.36 50.613,95.573 51.98,96.94 82.02,96.94 83.44,95.52 83.44,78.56 84.32,77.68 84.32,72.93 85.27,71.98 112.02,71.98 122.62,61.38 ; K16.4@119.533,55.842 120.972,55.842 122.02,56.89 122.02,60.78 122.62,61.38 ; K16.4@120.148,55.412 cw(c120.972,54.837) 120.972,55.842 cw(c120.972,56.847) K16.4@120.148,56.272 ; K14.4@125.462,55.842 127.039,55.842 ; K14.4@126.044,55.369 cw(c127.039,54.559) 127.039,55.842 ; K14.4@126.044,56.315 ccw(c127.039,57.125) 127.039,55.842 ; 127.657,61.38 128.057,60.98 ; 128.457,61.38 128.057,60.98 ; K12.4@131.392,55.842 132.969,55.842 ; K12.4@131.974,55.369 cw(c132.969,54.559) 132.969,55.842 ; K12.4@131.974,56.315 ccw(c132.969,57.125) 132.969,55.842 ; 133.587,61.38 133.987,60.98 ; 134.387,61.38 133.987,60.98 ; K10.4@137.321,55.842 138.898,55.842 ; K10.4@137.903,55.369 cw(c138.898,54.559) 138.898,55.842 ; K10.4@137.903,56.315 ccw(c138.898,57.125) 138.898,55.842 ; 139.516,61.38 139.916,60.98 ; 140.316,61.38 139.916,60.98 ; K8.4@143.251,55.842 144.828,55.842 145.846,56.86 145.846,60.98 ; K8.4@143.833,55.369 cw(c144.828,54.559) 144.828,55.842 cw(c144.828,57.125) K8.4@143.833,56.315 ; 145.446,61.38 145.846,60.98 ; 146.246,61.38 145.846,60.98 ; K6.4@149.18,55.842 150.757,55.842 ; K6.4@149.762,55.369 cw(c150.757,54.559) 150.757,55.842 ; K6.4@149.762,56.315 ccw(c150.757,57.125) 150.757,55.842 ; 151.375,61.38 151.775,60.98 ; 152.175,61.38 151.775,60.98 ; K4.4@155.11,55.842 156.687,55.842 ; K4.4@155.691,55.369 cw(c156.686,54.559) 156.686,55.842 ; K4.4@155.691,56.315 ccw(c156.686,57.125) 156.686,55.842 ; 157.305,61.38 157.705,60.98 ; 158.105,61.38 157.705,60.98 ; K2.4@161.039,55.842 162.616,55.842 ; K2.4@161.621,55.369 cw(c162.616,54.559) 162.616,55.842 ; K2.4@161.621,56.315 ccw(c162.616,57.125) 162.616,55.842 ; 163.234,61.38 163.634,60.98 ; 164.034,61.38 163.634,60.98 ; K15.4@166.969,55.842 168.545,55.842 ; K15.4@167.55,55.369 cw(c168.545,54.559) 168.545,55.842 ; K15.4@167.55,56.315 ccw(c168.545,57.125) 168.545,55.842 ; 169.163,61.38 169.563,60.98 ; 169.963,61.38 169.563,60.98 ; K13.4@172.898,55.842 174.475,55.842 ; K13.4@173.48,55.369 cw(c174.475,54.559) 174.475,55.842 ; K13.4@173.48,56.315 ccw(c174.475,57.125) 174.475,55.842 ; 175.093,61.38 175.493,60.98 ; 175.893,61.38 175.493,60.98 ; K11.4@186.88,55.842 188.457,55.842 ; K11.4@187.461,55.369 cw(c188.456,54.559) 188.456,55.842 ; K11.4@187.461,56.315 ccw(c188.456,57.125) 188.456,55.842 ; 189.075,61.38 189.475,60.98 ; 189.875,61.38 189.475,60.98 ; K9.4@192.859,55.842 194.435,55.842 ; K9.4@193.44,55.369 cw(c194.435,54.559) 194.435,55.842 ; K9.4@193.44,56.315 ccw(c194.435,57.125) 194.435,55.842 ; 195.053,61.38 195.453,60.98 ; 195.853,61.38 195.453,60.98 ; K7.4@198.837,55.842 200.414,55.842 ; K7.4@199.419,55.369 cw(c200.414,54.559) 200.414,55.842 ; K7.4@199.419,56.315 ccw(c200.414,57.125) 200.414,55.842 ; 201.032,61.38 201.432,60.98 ; 201.832,61.38 201.432,60.98 ; K5.4@204.816,55.842 206.393,55.842 ; K5.4@205.398,55.369 cw(c206.393,54.559) 206.393,55.842 ; K5.4@205.398,56.315 ccw(c206.393,57.125) 206.393,55.842 ; 207.011,61.38 207.411,60.98 ; 207.811,61.38 207.411,60.98 ; K3.4@210.795,55.842 212.372,55.842 ; K3.4@211.377,55.369 cw(c212.372,54.559) 212.372,55.842 ; K3.4@211.377,56.315 ccw(c212.372,57.125) 212.372,55.842 ; 212.99,61.38 213.39,60.98 ; 213.79,61.38 213.39,60.98 ; K1.4@216.774,55.842 216.786,55.83 218.75,55.83 219.65,56.73 219.65,60.52 218.79,61.38 122.62,61.38 ; K1.4@217.304,55.312 cw(c218.556,54.06) 218.556,55.83 ; K1.4@217.304,56.372 ccw(c218.614,57.682) 218.614,55.83 ; 127.039,55.842 128.057,56.86 128.057,60.98 ; 132.969,55.842 133.987,56.86 133.987,60.98 ; 138.898,55.842 139.916,56.86 139.916,60.98 ; 150.757,55.842 151.775,56.86 151.775,60.98 ; 156.687,55.842 157.705,56.86 157.705,60.98 ; 162.616,55.842 163.634,56.86 163.634,60.98 ; 168.545,55.842 169.563,56.86 169.563,60.98 ; 174.475,55.842 175.493,56.86 175.493,60.98 ; 188.457,55.842 189.475,56.86 189.475,60.98 ; 194.435,55.842 195.453,56.86 195.453,60.98 ; 200.414,55.842 201.432,56.86 201.432,60.98 ; 206.393,55.842 207.411,56.86 207.411,60.98 ; 212.372,55.842 213.39,56.86 213.39,60.98
  Top Layer w0.8: R45.1@22.5,73.8 22.5,73.81 TP1.1@25.35,76.66 35.48,86.79 36.61,86.79 50.25,86.79 D27.1@50.95,86.09 ; 35.8,86.79 ccw(c35.8,87.729) C38.2@36.464,87.065 ; C38.2@36.796,87.065 ccw(c37.46,87.729) 37.46,86.79 ; 38.295,86.79 ccw(c38.295,87.729) C39.2@38.959,87.065 ; C39.2@39.291,87.065 ccw(c39.955,87.729) 39.955,86.79 ; 40.79,86.79 ccw(c40.79,87.729) C40.2@41.454,87.065 ; C40.2@41.786,87.065 ccw(c42.45,87.729) 42.45,86.79 ; 43.285,86.79 ccw(c43.285,87.729) C41.2@43.949,87.065 ; C41.2@44.281,87.065 ccw(c44.945,87.729) 44.945,86.79 ; 45.78,86.79 ccw(c45.78,87.729) C42.2@46.444,87.065 ; C42.2@46.776,87.065 ccw(c47.44,87.729) 47.44,86.79 ; D26.2@50.613,90.36 50.613,85.987 D27.1@50.65,85.95
  Bottom Layer w0.3: K16.4@118.932,55.241 cw(c117.481,53.79) 119.533,53.79 cw(c121.585,53.79) K16.4@120.134,55.241 ; K16.4@119.144,55.453 cw(c118.205,54.514) 119.533,54.514 cw(c120.861,54.514) K16.4@119.922,55.453 ; R18.2@119.251,53.153 ccw(c118.57,53.834) 119.533,53.834 ; 119.533,54.128 ccw(c120.912,54.128) R18.2@119.937,53.153 ; K16.4@119.533,55.842 119.533,52.82 R18.2@119.734,52.82 ; K14.4@124.861,55.241 cw(c122.82,53.2) R16.2@125.707,53.2 ; K14.4@125.074,55.453 cw(c123.545,53.924) 125.707,53.924 ; R16.2@125.108,53.183 ccw(c123.663,54.628) 125.707,54.628 ; K14.4@125.286,55.665 cw(c124.269,54.648) 125.707,54.648 ; R16.2@125.32,52.971 ccw(c124.387,53.904) 125.707,53.904 ; K14.4@125.462,55.842 125.707,55.842 R16.2@125.707,52.82 ; 125.707,54.38 cw(c126.925,54.38) K14.4@126.063,55.241 ; K12.4@130.791,55.241 cw(c129.34,53.79) 131.392,53.79 cw(c133.444,53.79) K12.4@131.993,55.241 ; K12.4@131.003,55.453 cw(c130.064,54.514) 131.392,54.514 cw(c132.72,54.514) K12.4@131.781,55.453 ; R14.2@131.061,53.173 ccw(c130.262,53.972) 131.392,53.972 ; 131.392,54.03 ccw(c132.604,54.03) R14.2@131.747,53.173 ; K12.4@131.392,55.842 131.392,52.82 R14.2@131.68,52.82 ; K10.4@136.72,55.241 cw(c135.269,53.79) 137.321,53.79 cw(c139.373,53.79) K10.4@137.922,55.241 ; K10.4@136.932,55.453 cw(c135.993,54.514) 137.321,54.514 cw(c138.649,54.514) K10.4@137.71,55.453 ; R12.2@136.951,53.183 ccw(c136.057,54.077) 137.321,54.077 ; 137.321,53.945 ccw(c138.399,53.945) R12.2@137.637,53.183 ; K10.4@137.321,55.842 137.321,52.82 R12.2@137.652,52.82 ; K8.4@142.65,55.241 cw(c141.199,53.79) 143.251,53.79 cw(c145.303,53.79) K8.4@143.852,55.241 ; K8.4@142.862,55.453 cw(c141.923,54.514) 143.251,54.514 cw(c144.579,54.514) K8.4@143.64,55.453 ; R10.2@142.891,53.183 ccw(c142.023,54.051) 143.251,54.051 ; 143.251,53.97 ccw(c144.364,53.97) R10.2@143.577,53.183 ; K8.4@143.251,55.842 143.251,52.82 R10.2@143.625,52.82 ; K6.4@148.579,55.241 cw(c147.128,53.79) 149.18,53.79 cw(c151.232,53.79) K6.4@149.781,55.241 ; K6.4@148.791,55.453 cw(c147.852,54.514) 149.18,54.514 cw(c150.508,54.514) K6.4@149.569,55.453 ; R8.2@148.798,53.133 ccw(c147.875,54.056) 149.18,54.056 ; 149.18,53.866 ccw(c150.217,53.866) R8.2@149.484,53.133 ; K6.4@149.18,55.842 149.18,52.82 R8.2@149.598,52.82 ; K4.4@154.509,55.241 cw(c153.058,53.79) 155.11,53.79 cw(c157.162,53.79) K4.4@155.711,55.241 ; R6.1@154.674,53.203 ccw(c153.622,54.255) 155.11,54.255 ; K4.4@154.721,55.453 cw(c153.782,54.514) 155.11,54.514 cw(c156.437,54.514) K4.4@155.499,55.453 ; R6.1@154.886,52.991 ccw(c154.347,53.53) 155.11,53.53 ; 155.11,53.807 ccw(c155.964,53.807) R6.1@155.36,53.203 ; K4.4@155.11,55.842 155.11,52.82 R6.1@155.571,52.82 ; v1(159.67,46) 160.94,46 U6.10@161.3,45.64 ; v1@159.811,45.859 cw(c160.153,45.517) 160.153,46 cw(c160.153,46.483) v1@159.811,46.141 ; K2.4@160.438,55.241 cw(c158.987,53.79) 161.039,53.79 cw(c163.091,53.79) K2.4@161.64,55.241 ; 160.499,46 cw(c160.499,44.996) U6.10@161.209,45.706 ; R4.1@160.644,53.163 ccw(c159.69,54.117) 161.039,54.117 ; K2.4@160.65,55.453 cw(c159.711,54.514) 161.039,54.514 cw(c162.367,54.514) K2.4@161.428,55.453 ; 161.039,53.865 ccw(c162.032,53.865) R4.1@161.33,53.163 ; K2.4@161.039,55.842 161.039,52.82 R4.1@161.544,52.82 ; U6.10@161.209,43.953 cw(c160.988,43.733) 161.3,43.733 cw(c161.612,43.733) U6.10@161.391,43.953 ; U6.10@161.3,44.921 161.3,43.5 161.64,43.16 172.21,43.16 172.93,43.88 172.93,49.656 ; K15.4@166.367,55.241 cw(c164.916,53.79) 166.969,53.79 cw(c169.021,53.79) K15.4@167.57,55.241 ; K15.4@166.58,55.453 cw(c165.641,54.514) 166.969,54.514 cw(c168.296,54.514) K15.4@167.357,55.453 ; R17.1@166.667,53.173 ccw(c165.939,53.901) 166.969,53.901 ; R17.1@166.781,52.402 cw(c166.576,52.02) 167.01,52.02 ; 166.969,54.101 ccw(c168.281,54.101) R17.1@167.353,53.173 ; K15.4@166.969,55.842 166.969,52.82 R17.1@167.517,52.82 ; R17.1@167.01,52.83 167.01,52.02 ; R17.1@167.239,52.402 ccw(c167.444,52.02) 167.01,52.02 ; K13.4@172.297,55.241 cw(c170.846,53.79) 172.898,53.79 cw(c174.95,53.79) K13.4@173.499,55.241 ; K13.4@172.509,55.453 cw(c171.57,54.514) 172.898,54.514 cw(c174.226,54.514) K13.4@173.287,55.453 ; R15.1@172.52,53.223 ccw(c171.608,54.135) 172.898,54.135 ; 172.61,49.976 172.93,49.656 ; 172.898,53.967 ccw(c173.95,53.967) R15.1@173.206,53.223 ; K13.4@172.898,55.842 172.898,52.82 R15.1@173.489,52.82 ; 173.25,49.976 172.93,49.656 ; K11.4@186.279,55.241 cw(c184.828,53.79) 186.88,53.79 cw(c188.932,53.79) K11.4@187.481,55.241 ; K11.4@186.491,55.453 cw(c185.552,54.514) 186.88,54.514 cw(c188.207,54.514) K11.4@187.269,55.453 ; R13.1@186.517,53.153 ccw(c185.642,54.028) 186.88,54.028 ; 186.88,53.933 ccw(c187.983,53.933) R13.1@187.203,53.153 ; K11.4@186.88,55.842 186.88,52.82 R13.1@187.07,52.82 ; U4.10@189.209,45.889 ccw(c188.988,46.11) 189.3,46.11 ccw(c189.612,46.11) U4.10@189.391,45.889 ; U4.10@189.3,44.921 189.3,47.21 186.534,49.976 169.054,49.976 167.01,52.02 ; K9.4@192.257,55.241 cw(c191.117,54.1) 192.73,54.1 ; R11.1@192.387,53.153 ccw(c191.559,53.981) 192.73,53.981 ccw(c193.901,53.981) R11.1@193.073,53.153 ; K9.4@192.47,55.453 cw(c191.841,54.824) 192.73,54.824 ; R11.1@192.73,52.81 192.73,55.713 K9.4@192.859,55.842 ; 192.73,53.48 cw(c195.221,53.48) K9.4@193.46,55.241 ; 192.73,54.204 cw(c194.497,54.204) K9.4@193.247,55.453 ; K7.4@198.236,55.241 cw(c197.044,54.049) 198.73,54.049 ; R9.1@198.387,53.153 ccw(c197.559,53.981) 198.73,53.981 ccw(c199.901,53.981) R9.1@199.073,53.153 ; K7.4@198.448,55.453 cw(c197.769,54.773) 198.73,54.773 ; R9.1@198.73,52.81 K7.4@198.73,56.15 ; 198.73,53.531 cw(c201.149,53.531) K7.4@199.438,55.241 ; 198.73,54.255 cw(c200.424,54.255) K7.4@199.226,55.453 ; K5.4@204.215,55.241 cw(c202.827,53.853) 204.79,53.853 ; K5.4@204.427,55.453 cw(c203.552,54.578) 204.79,54.578 ; R7.1@204.447,53.153 ccw(c203.619,53.981) 204.79,53.981 ccw(c205.961,53.981) R7.1@205.133,53.153 ; R7.1@204.79,52.81 204.79,55.816 K5.4@204.816,55.842 ; 204.79,53.727 cw(c206.932,53.727) K5.4@205.417,55.241 ; 204.79,54.451 cw(c206.207,54.451) K5.4@205.205,55.453 ; K3.4@210.194,55.241 cw(c208.755,53.802) 210.79,53.802 ; K3.4@210.406,55.453 cw(c209.48,54.526) 210.79,54.526 ; R5.1@210.447,53.153 ccw(c209.619,53.981) 210.79,53.981 ccw(c211.961,53.981) R5.1@211.133,53.153 ; R5.1@210.79,52.81 210.79,55.837 K3.4@210.795,55.842 ; 210.79,53.778 cw(c212.859,53.778) K3.4@211.396,55.241 ; 210.79,54.502 cw(c212.135,54.502) K3.4@211.184,55.453 ; K1.4@216.173,55.241 cw(c214.659,53.727) 216.8,53.727 ; K1.4@216.385,55.453 cw(c215.383,54.451) 216.8,54.451 ; R3.1@216.457,53.153 ccw(c215.629,53.981) 216.8,53.981 ccw(c217.971,53.981) R3.1@217.143,53.153 ; K1.4@216.774,55.842 216.8,55.816 R3.1@216.8,52.81 ; 216.8,53.853 cw(c218.763,53.853) K1.4@217.375,55.241 ; 216.8,54.577 cw(c218.039,54.577) K1.4@217.163,55.453
VDD_5V: C58.1 C59.2 C61.1 CA2.1 L4.2 P1.3 P1.4 R54.2 U5.1 U15.3 | length 55.9
  Top Layer w0.5: U15.3@38.246,33.971 42.22,29.998 U5.1@42.22,20.236 ; P1.3@62.738,25.658 P1.4@62.738,28.198
  Bottom Layer w0.5: C59.2@26.45,37.364 26.57,37.244 26.57,36.34 27.37,35.54 v1(28.53,35.54) ; U5.1@42.234,20.25 42.22,20.236 42.22,16.84 43.22,15.84 58.32,15.84 59.38,16.9 59.38,22.64 60.2,23.46 61.06,23.46 62.738,25.138 P1.3@62.738,25.658 P1.4@62.738,28.198
VIN_D: Q1.5 Q1.6 Q1.7 Q1.8 R45.2 U13.1 | length 14.5
  Top Layer w0.3: U13.1@16.33,67.31 17.83,67.31 18.7,68.18 18.7,70.52 19.57,71.39 22.01,71.39 R45.2@22.5,70.9 ; 19.835,71.39 cw(c19.835,68.51) R45.2@21.871,70.546 ; 20.559,71.39 cw(c20.559,69.234) R45.2@22.084,70.759 ; 21.283,71.39 cw(c21.283,69.958) R45.2@22.296,70.971
VOUT1: C23.1 D21.1 FB1.2 J2.1 P4.29 | length 58.9
  Top Layer w0.3: P4.29@69.462,91.76 cw(c66.686,91.76) 68.649,89.797 cw(c70.612,87.834) P4.29@70.612,90.61 ; P4.29@69.762,91.76 cw(c67.71,91.76) 69.161,90.309 cw(c70.612,88.858) P4.29@70.612,90.91 ; P4.29@70.062,91.76 cw(c68.734,91.76) 69.673,90.821 cw(c70.612,89.882) P4.29@70.612,91.21 ; P4.29@70.612,91.76 66.56,87.708 66.56,70.29 J2.1@74.51,62.34
  Top Layer w0.5: FB1.2@74.191,57.638 ccw(c74.167,57.98) 74.51,57.98 ; J2.1@74.192,62.022 cw(c73.424,61.254) 74.51,61.254 cw(c75.596,61.254) J2.1@74.828,62.022 ; J2.1@74.51,62.34 74.51,57.98 ; FB1.2@75.25,57.24 74.51,57.98
  Bottom Layer w0.5: J2.1@74.192,62.022 cw(c73.424,61.254) 74.51,61.254 cw(c75.596,61.254) J2.1@74.828,62.022 ; J2.1@74.51,62.34 74.51,57.55 C23.1@75.02,57.04
VOUT2: C34.1 D24.1 FB2.2 J4.1 P4.30 | length 59.6
  Top Layer w0.3: P4.30@69.503,80.455 cw(c68.194,80.095) 69.154,79.134 cw(c70.336,77.952) P4.30@70.499,79.616 ; 69.519,79.499 ccw(c68.765,80.252) P4.30@69.792,80.534 ; 69.603,79.583 cw(c70.416,78.769) P4.30@70.529,79.914 ; P4.30@70.612,80.76 70.612,80.592 69.07,79.05 69.07,71.92 75.2,65.79 93.39,65.79 94.82,64.36 J4.1@94.82,62.29
  Top Layer w0.5: D24.1@94.276,59.201 cw(c93.922,58.847) 94.423,58.847 cw(c94.923,58.847) D24.1@94.569,59.201 ; D24.1@94.276,59.799 ccw(c93.922,60.153) 94.423,60.153 ccw(c94.923,60.153) D24.1@94.569,59.799 ; J4.1@94.82,62.29 94.423,61.893 94.423,57.831 FB2.2@95.05,57.204
  Bottom Layer w0.5: J4.1@94.502,61.972 cw(c93.734,61.204) 94.82,61.204 cw(c95.906,61.204) J4.1@95.138,61.972 ; J4.1@94.82,62.29 94.82,57.13 C34.1@94.97,56.98
pads on no net: J1.1 J1.4 J1.8 J1.10 J1.11 P1.5 P1.6 P1.7 P1.8 P1.9 P1.10 P1.28 P1.29 P1.30 P1.31 P1.32 P1.33 P1.34 P1.35 P1.36 P1.37 P1.38 P1.39 P1.40 P1.42 P2.3 P2.4 P2.5 P2.6 P2.22 P2.23 P2.24 P2.25 P2.27 P2.28 P2.29 P2.30 P2.31 P2.32 P2.33 P2.34 P2.35 P2.36 P2.37 P2.38 P2.39 P2.40 P2.41 P2.42 P2.43 P2.44 P2.45 P2.46 RJ45. RJ45.4 RJ45.5 RJ45.7 RJ45.9 RJ45.10 RJ45.11 RJ45.12 U1.18 U1.19 U1.30 U2.13 U2.14 U2.15 U2.18 U2.19 U2.20 U2.21 U2.22 U2.23 U2.24 U2.30 U3.1 U8.5 U10.3 U10.4 U10.5 U10.6 U10.8 U10.9 U10.10 U10.12 U10.13 U10.14 U10.17 U10.20 U10.21 U10.22 U10.23 U10.24 U10.25 U10.26 U10.27 U10.28 U10.29 U11.3 U11.16 U11.20 U12.3 U12.16 U12.20 U16.2 U16.3 U16.5

## Polygon pours and split planes (outlines as drawn)
DGND on Top Layer "Top Layer-No Net" (solid, remove dead copper, pour order 1008): 61.787,0.537 235.867,0.537 236.49,1.16 236.49,16.66 239.92,20.09 245.93,20.09 246.48,20.64 246.48,22.32 246.19,22.61 225.18,22.61 223.61,24.18 220.1,24.18 219.33,24.95 219.33,41.25 221.95,43.87 245.8,43.87 245.8,43.94 246.48,44.62 246.48,81.16 245.82,81.82 239.82,81.82 236.55,85.09 236.55,100.18 235.3,101.43 63.8,101.43 56.86,94.49 56.86,5.465
GND_SIG on Top Layer "Top Layer-No Net" (solid, remove dead copper, pour order 1006): 62.24,49.19 62.24,69.82 63.5,71.08 109.16,71.08 111.77,68.47 111.77,33.43 110.38,32.04 71.25,32.04 70.39,31.18 65.89,31.18 65.18,31.89 65.18,42.4 64.31,43.27 63.19,43.27 62.22,44.24 62.22,49.17
VIN_D on Top Layer "Top Layer-No Net" (solid, remove dead copper, pour order 1005): 19.38,67.17 24.19,67.17 24.38,67.36 24.38,70.59 23.43,71.54 22.81,71.54 21.57,70.3 19.74,70.3 19.23,69.79 19.23,67.32 19.38,67.17
NetD28_2 on Top Layer "Top Layer-No Net" (solid, remove dead copper, pour order 1004): 42.34,63.71 42.34,60.5 41.66,59.82 39.68,59.82 39.34,59.48 39.34,55.65 38.1,54.41 38.1,50.83 38.44,50.49 44.47,50.49 44.88,50.9 44.88,59.47 43.4,60.95 43.4,63.6 43.29,63.71
NetC56_2 on Top Layer "Top Layer-No Net" (solid, remove dead copper, pour order 1003): 11.38,47.16 11.38,44.31 10.42,43.35 9.24,43.35 8.61,42.72 8.61,38.61 8.88,38.34 12.14,38.34 14.22,40.42 22.26,40.42 22.89,41.05 22.89,46.6 21.95,47.54 11.76,47.54 11.38,47.16
VDD_5V on Top Layer "Top Layer-No Net" (solid, remove dead copper, pour order 1002): 39.49,32.35 38.69,33.15 36.95,33.15 25.51,33.15 22.92,30.56 10.14,30.56 9.29,31.41 9.29,36.27 9.6,36.58 10.1,37.08 22.33,37.08 32.95,37.08 33.44,36.59 35.33,36.59 35.7,36.22 35.7,35.16 36.1,34.76 39.59,34.76 39.74,34.61 39.74,32.6 39.49,32.35
+15V on Top Layer "Top Layer-No Net" (solid, remove dead copper, pour order 1001): 35,43.08 55.97,43.08 57.96,45.07 61.2,45.07 61.36,45.23 61.36,47.28 61.22,47.42 34.99,47.42 34.55,46.98 34.55,43.53
V3_3D on Top Layer "Top Layer-No Net" (solid, remove dead copper, pour order 1000): 41.44,32.86 53.67,32.86 53.94,33.13 53.94,35.97 53.78,36.13 48.61,36.13 45.64,39.1 41.28,39.1 40.68,38.5 40.68,33.62
DGND on Top Layer "Top Layer-No Net" (solid, remove dead copper, pour order 1007): 61.25,71.48 61.25,43.74 62.33,42.66 62.33,1.08 61.62,0.37 11.93,0.37 10.63,1.67 10.63,16.8 7.12,20.31 1.87,20.31 0.39,21.79 0.39,80.37 1.35,81.33 6.91,81.33 10.53,84.95 10.53,100.26 11.7,101.43 63.8,101.43 65.07,100.16 65.07,73.98 63.85,72.76 62.53,72.76
DGND on Bottom Layer "Top Layer-No Net" (solid, remove dead copper, pour order 1011): 61.25,71.44 61.25,43.79 62.36,42.68 62.36,1.13 61.76,0.53 11.83,0.53 10.66,1.7 10.66,16.83 7.23,20.26 1.86,20.26 0.49,21.63 0.49,80.49 1.41,81.41 6.92,81.41 10.53,85.02 10.53,100.19 11.77,101.43 63.82,101.43 65.05,100.2 65.05,73.98 63.55,72.48 62.29,72.48 61.25,71.44
DGND on Bottom Layer "Top Layer-No Net" (solid, remove dead copper, pour order 1010): 61.767,0.537 235.867,0.537 236.56,1.23 236.56,16.75 239.13,19.32 239.9,20.09 245.33,20.09 245.96,20.09 246.66,20.79 246.66,22.14 246.2,22.6 225.19,22.6 223.9,23.89 223.59,24.2 220.1,24.2 219.3,25 219.3,25.81 219.3,41.25 221.18,43.13 221.91,43.86 237.35,43.86 245.75,43.86 246.45,44.56 246.45,81.22 245.86,81.81 239.89,81.81 236.93,84.77 236.52,85.18 236.52,93.94 236.52,100.21 235.51,101.22 235.3,101.43 63.82,101.43 61.25,98.86 61.25,71.44 61.25,1.055 61.767,0.537
GND_SIG on Bottom Layer "Top Layer-No Net" (solid, remove dead copper, pour order 1009): 65.17,34.13 65.17,42.36 63.55,43.98 62.22,45.31 62.22,49.7 62.22,61.89 63.8,63.47 107.05,63.47 108.64,61.88 108.64,34.18 106.7,32.24 67.06,32.24 65.17,34.13

## Keep-outs
Keep-Out Layer:
  circle w0.3: c29,89 r2
  circle w0.3: c218,89 r2
  circle w0.3: c218,14 r2
  circle w0.3: c29,14 r2
  circle w0.254: c181.138,73.054 r1.7
  circle w0.254: c33.138,73.054 r1.7
  circle w0.254: c33.138,29.054 r1.7
  circle w0.254: c181.138,29.054 r1.7
  lines w0.254: 0,21.02 ccw(c1.27,21.02) 1.27,19.75 4.5,19.75 cw(c4.5,14.25) 10,14.25 10,1.27 ccw(c11.27,1.27) 11.27,0 12.54,0 235.857,0 ccw(c235.857,1.143) 237,1.143 237,14.243 cw(c242.5,14.243) 242.5,19.743 245.73,19.743 ccw(c245.73,21.013) 247,21.013 247,22.371 247,80.156 247,80.98 ccw(c245.73,80.98) 245.73,82.25 242.5,82.25 cw(c242.5,87.75) 237,87.75 237,100.73 ccw(c235.73,100.73) 235.73,102 234.46,102 11.143,102 ccw(c11.143,100.857) 10,100.857 10,87.757 cw(c4.5,87.757) 4.5,82.257 1.27,82.257 ccw(c1.27,80.987) 0,80.987 0,79.629 0,21.844 0,21.02

## Other copper
Top Layer:
  rectangle net DGND: 138.26,26.3 142.17,30.13
  rectangle net DGND: 134.82,12.58 138.27,15.82
  rectangle net DGND: 180.7,51.3 184.02,56.06
  rectangle net DGND: 203.87,36.02 208.47,40.95
  rectangle net DGND: 239.66,47.75 244.05,52.19
Bottom Layer:
  rectangle net DGND: 137.99,26.57 142.18,30.06
  rectangle net DGND: 134.23,12.28 138.59,16.15
  rectangle net DGND: 180.78,52.05 184.05,55.74
  rectangle net DGND: 239.98,47.77 243.85,52.09
  rectangle net DGND: 203.58,36.16 208.07,40.41
  rectangle net DGND: 24.66,49.67 32.88,56.32

## Silkscreen, mask and mechanical layers (free items; w line width, h text height)
Top Overlay:
  circle w0.254: c29,89 r4
  circle w0.254: c29,14 r4
  circle w0.254: c218,89 r4
  circle w0.254: c218,14 r4
  circle w0.254: c33.138,73.054 r4
  circle w0.254: c33.138,29.054 r4
  circle w0.254: c181.138,73.054 r4
  circle w0.254: c181.138,29.054 r4

## Dimensions
11.143,102 to 12.54,0 on Top Overlay
0,79.629 to 247,80.156 on Top Overlay